# Altium PCB 175-00024_rev3, Backplane, Instrument Crate.PcbDoc (part 3 of 4)
Units mil, origin at the board's own origin, x right, y up, seen from the top; angles counter-clockwise.
Board outline 8400 x 10183.07 mil, 8 copper layers (Top Layer (*.GTL), Mid-Layer 1 (*.G1), +3.3V (*.GP1), +24V (*.GP2), RTN (*.GP3), +12V (*.GP4), Signal GND (*.GP5), Bottom Layer (*.GBL)); 240 components, 169 nets, 1580 pads, 490 vias.
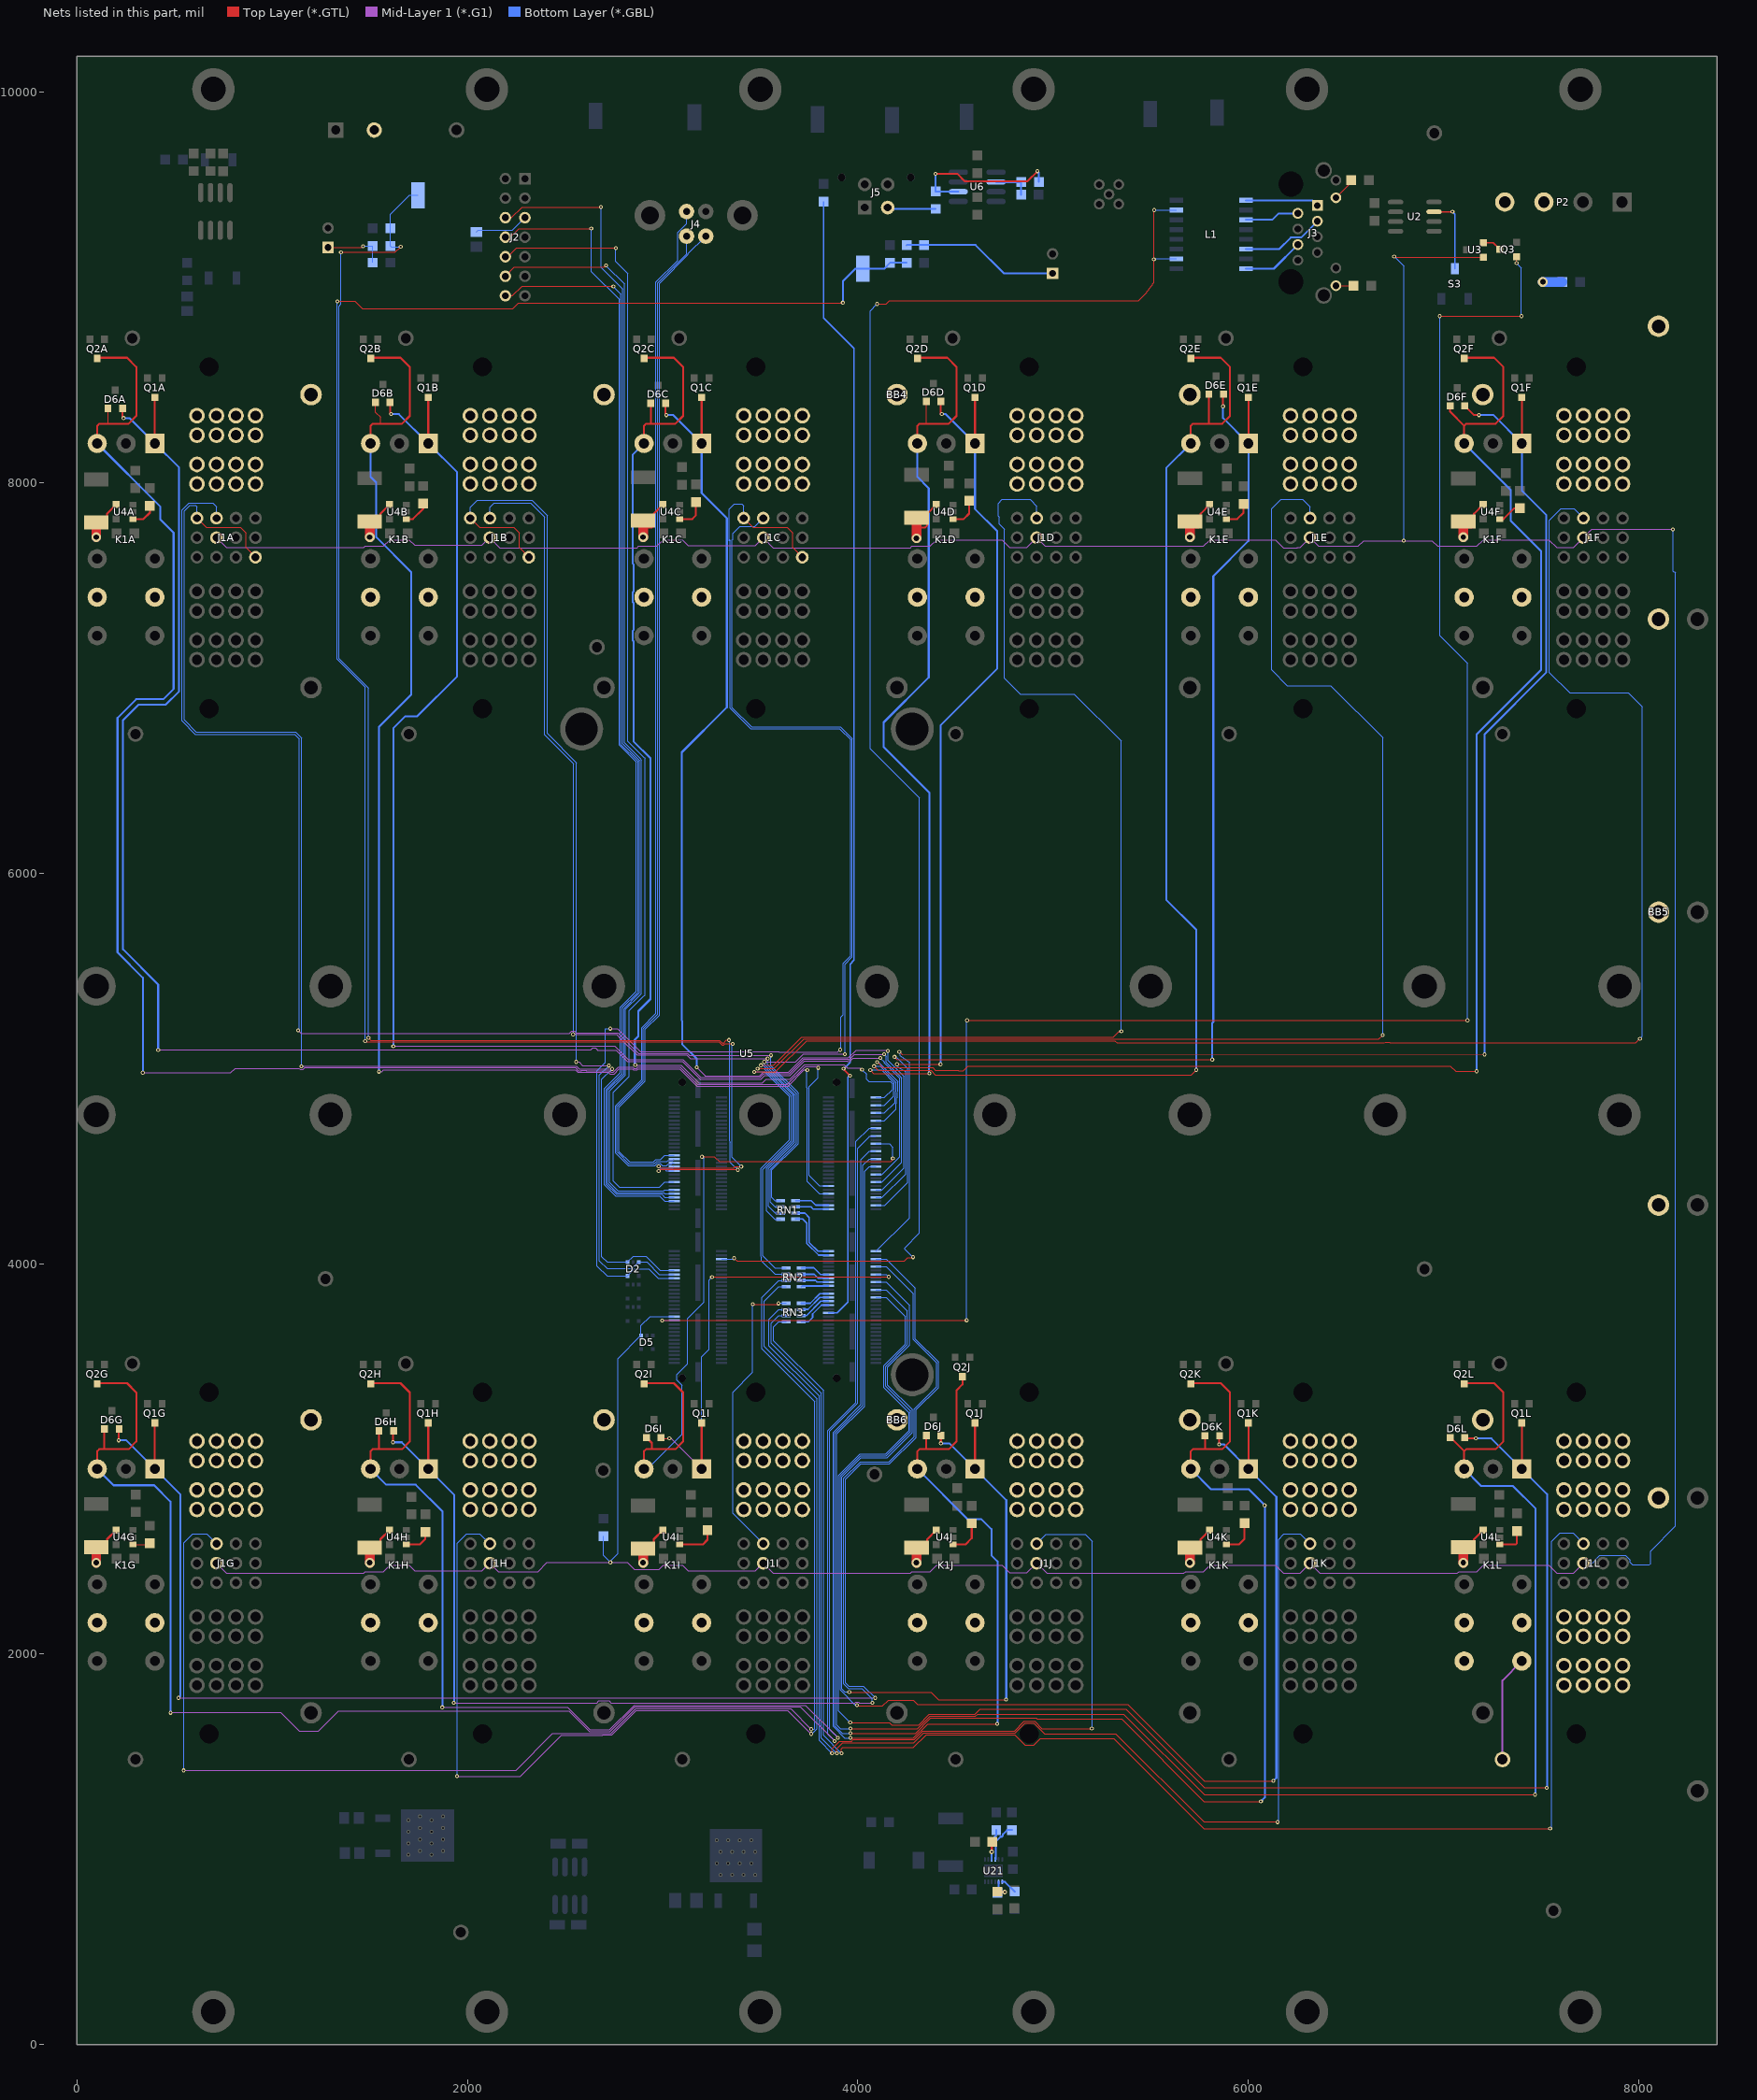
[diagram p9: the nets of this part, all layers, seen from the top]

## Via types
v1: diameter 20, hole 10, Top Layer (*.GTL) to Bottom Layer (*.GBL), 422 vias
v2: diameter 24, hole 10, Top Layer (*.GTL) to Bottom Layer (*.GBL), 28 vias
v3: diameter 50, hole 28, Top Layer (*.GTL) to Bottom Layer (*.GBL), 26 vias
v4: diameter 32, hole 20, Top Layer (*.GTL) to Bottom Layer (*.GBL), 10 vias
v5: diameter 25.98, hole 12.99, Top Layer (*.GTL) to Bottom Layer (*.GBL), tented top, 2 vias
v6: diameter 50, hole 25, Top Layer (*.GTL) to Bottom Layer (*.GBL), 2 vias

## Nets (pads, with @x,y where several pads share a name; then routed paths per layer and width w, separated by ;. In a path a pad name is that pad's centre, name@x,y a point inside that pad or via, vN(x,y) a via of type N, cw(c..) or ccw(c..) an arc to the next point about the centre after c; other vN are vias at no path point) (continued)
NetJ1L_13: J1L.13 J1L.14 K1L.14 TP10L.1 | length 544.8
  Mid-Layer 1 (*.G1) w10: TP10L.1@7300.99,1460.82 7300.99,1865.57 K1L.14@7399.99,1964.57
NetJ2_5: J2.5 R5.1 | length 279.5
  Bottom Layer (*.GBL) w5: R5.1@2046,9282.48 2055.63,9292.11 2231.03,9292.11 J2.5@2295,9356.08
NetJ3_1: J3.1 L1.1 | length 377.2
  Bottom Layer (*.GBL) w10: L1.1@5987,9445.08 6326,9445.08 J3.1@6353,9418.08
NetJ3_2: J3.2 L1.3 | length 279.7
  Bottom Layer (*.GBL) w10: L1.3@5987,9345.08 6122,9345.08 6155,9378.08 J3.2@6253,9378.08
NetJ3_3: J3.3 L1.6 | length 425.2
  Bottom Layer (*.GBL) w10: L1.6@5987,9195.08 6157,9195.08 6216.5,9254.58 6269.5,9254.58 J3.3@6353,9338.08
NetJ3_6: J3.6 L1.8 | length 316.9
  Bottom Layer (*.GBL) w10: L1.8@5987,9095.08 6130,9095.08 J3.6@6253,9218.08
NetJ3_10: J3.10 R6.2 | length 122.3
  Top Layer (*.GTL) w5: J3.10@6448,9458.08 6526,9536.08 R6.2@6526,9548.08
NetJ3_12: J3.12 R7.2 | length 91
  Top Layer (*.GTL) w5: J3.12@6448,9008.08 R7.2@6539,9008.08
NetJ5_2: J5.2 R16.1 | length 247.9
  Bottom Layer (*.GBL) w10: J5.2@4153,9408 4160,9401 R16.1@4398,9401
NetK1A_11: K1A.11 R4A.2 U4A.4 | length 261.4
  Top Layer (*.GTL) w10: R4A.2@100,7770 145,7770 155,7780 155,7840 U4A.4@202,7887
  Top Layer (*.GTL) w50: v3(100,7720) 100,7770 R4A.2@100,7795.76
NetK1B_11: K1B.11 R4B.2 U4B.4 | length 265.6
  Top Layer (*.GTL) w10: R4B.2@1500,7770 1545,7770 1555,7780 1555,7840 U4B.4@1602,7887
  Top Layer (*.GTL) w50: v3(1500,7720) 1500,7770 R4B.2@1500,7800
NetK1C_11: K1C.11 R4C.2 U4C.4 | length 265.6
  Top Layer (*.GTL) w10: 2900,7770 2945,7770 2955,7780 2955,7840 U4C.4@3002,7887
  Top Layer (*.GTL) w50: v3(2900,7720) 2900,7770 R4C.2@2900,7800
NetK1D_11: K1D.11 R4D.2 U4D.4 | length 271.6
  Top Layer (*.GTL) w10: 4300,7770 4345,7770 4355,7780 4355,7840 U4D.4@4402,7887
  Top Layer (*.GTL) w50: v3(4300,7714) 4300,7770 R4D.2@4300,7800
NetK1E_11: K1E.11 R4E.2 U4E.4 | length 265.6
  Top Layer (*.GTL) w10: R4E.2@5700,7770 5745,7770 5755,7780 5755,7840 U4E.4@5802,7887
  Top Layer (*.GTL) w50: v3(5700,7720) 5700,7770 R4E.2@5700,7800
NetK1F_11: K1F.11 R4F.2 U4F.4 | length 265.6
  Top Layer (*.GTL) w10: R4F.2@7100,7770 7145,7770 7155,7780 7155,7840 U4F.4@7202,7887
  Top Layer (*.GTL) w50: v3(7100,7720) 7100,7770 R4F.2@7100,7800
NetK1G_11: K1G.11 R4G.2 U4G.4 | length 265.6
  Top Layer (*.GTL) w10: R4G.2@99.99,2518.82 144.99,2518.82 154.99,2528.82 154.99,2588.82 U4G.4@201.99,2635.82
  Top Layer (*.GTL) w50: v3(99.99,2468.82) 99.99,2518.82 R4G.2@99.99,2548.82
NetK1H_11: K1H.11 R4H.2 U4H.4 | length 265.6
  Top Layer (*.GTL) w10: R4H.2@1499.99,2518.82 1544.99,2518.82 1554.99,2528.82 1554.99,2588.82 U4H.4@1601.99,2635.82
  Top Layer (*.GTL) w50: v3(1499.99,2468.82) 1499.99,2518.82 R4H.2@1499.99,2548.82
NetK1I_11: K1I.11 R4I.2 U4I.4 | length 235.6
  Top Layer (*.GTL) w10: R4I.2@2899.99,2518.82 2944.99,2518.82 2954.99,2528.82 2954.99,2588.82 U4I.4@3001.99,2635.82
  Top Layer (*.GTL) w50: v3(2899.99,2468.82) R4I.2@2899.99,2518.82
NetK1J_11: K1J.11 R4J.2 U4J.4 | length 265.6
  Top Layer (*.GTL) w10: R4J.2@4299.99,2518.82 4344.99,2518.82 4354.99,2528.82 4354.99,2588.82 U4J.4@4401.99,2635.82
  Top Layer (*.GTL) w50: v3(4299.99,2468.82) 4299.99,2518.82 R4J.2@4299.99,2548.82
NetK1K_11: K1K.11 R4K.2 U4K.4 | length 265.6
  Top Layer (*.GTL) w10: R4K.2@5699.99,2518.82 5744.99,2518.82 5754.99,2528.82 5754.99,2588.82 U4K.4@5801.99,2635.82
  Top Layer (*.GTL) w50: v3(5699.99,2468.82) 5699.99,2518.82 R4K.2@5699.99,2548.82
NetK1L_11: K1L.11 R4L.2 U4L.4 | length 265.6
  Top Layer (*.GTL) w10: R4L.2@7099.99,2518.82 7144.99,2518.82 7154.99,2528.82 7154.99,2588.82 U4L.4@7201.99,2635.82
  Top Layer (*.GTL) w50: v3(7099.99,2468.82) 7099.99,2518.82 R4L.2@7099.99,2548.82
NetP1_1: P1.1 R8.1 R9.2 | length 807.5
  Bottom Layer (*.GBL) w10: R9.2@4250,9215.08 4251,9216.08 4603.08,9216.08 4748.16,9071 P1.1@4997,9071
NetP4_1: P4.1 R10.1 R11.2 | length 317.3
  Top Layer (*.GTL) w5: P4.1@1287,9203 1460,9203 v1(1467,9210)
  Bottom Layer (*.GBL) w5: v1(1467,9210) 1468,9211 R11.2@1516,9211 R10.1@1516,9126
NetQ3_3: Q3.3 U3.2 | length 98.5
  Top Layer (*.GTL) w8: U3.2@7204,9228 7253,9228 Q3.3@7288,9193
NetR14_1: R14.1 R15.2 U6.2 | length 193
  Bottom Layer (*.GBL) w10: U6.2@4707.46,9539 4708.46,9538 4836,9538 R15.2@4836,9474
NetR14_2: R14.2 R16.2 U6.6 | length 824.1
  Top Layer (*.GTL) w10: v1(4398,9581) 4508,9581 4546,9543 4869,9543 v1(4920,9594)
  Bottom Layer (*.GBL) w10: v1(4398,9581) R16.2@4398,9491 4400,9489 U6.6@4514.54,9489 ; v1(4920,9594) 4927,9587 R14.2@4927,9539
NetR17_1: R17.1 U5.B93 | length 5863.3
  Top Layer (*.GTL) w6: v1(3927,4998) 3927,4995 v1(3959,4963)
  Bottom Layer (*.GBL) w6: R17.1@3824,9439 3824,8843 3981,8686 3981,5554 3960,5533 3960,5031 v1(3927,4998) ; U5.B93@3849.28,3748.07 3894.07,3748.07 3949,3803 3949,4953 v1(3959,4963)
NetR18A_2: R18A.2 U4A.1 | length 135.7
  Top Layer (*.GTL) w10: U4A.1@288,7813 342,7813 375,7846 R18A.2@375,7881
NetR18B_2: R18B.2 U4B.1 | length 134.5
  Top Layer (*.GTL) w10: U4B.1@1688,7813 1722,7813 1774,7865 R18B.2@1774,7892
NetR18C_2: R18C.2 U4C.1 | length 158.9
  Top Layer (*.GTL) w10: U4C.1@3088,7813 3152,7813 3171,7832 R18C.2@3171,7900
NetR18D_2: R18D.2 U4D.1 | length 158.6
  Top Layer (*.GTL) w10: U4D.1@4488,7813 4542,7813 4570,7841 R18D.2@4570,7906
NetR18E_2: R18E.2 U4E.1 | length 145.7
  Top Layer (*.GTL) w10: U4E.1@5888,7813 5942,7813 5975,7846 R18E.2@5975,7891
NetR18F_2: R18F.2 U4F.1 | length 124.8
  Top Layer (*.GTL) w10: U4F.1@7288,7813 7307,7813 7362,7868 R18F.2@7390,7868
NetR18G_2: R18G.2 U4G.1 | length 89.6
  Top Layer (*.GTL) w5: U4G.1@287.99,2561.82 368.82,2561.82 R18G.2@375,2568
NetR18H_2: R18H.2 U4H.1 | length 144.1
  Top Layer (*.GTL) w10: U4H.1@1687.99,2561.82 1755.82,2561.82 1785,2591 R18H.2@1785,2626
NetR18I_2: R18I.2 U4I.1 | length 202
  Top Layer (*.GTL) w10: U4I.1@3087.99,2561.82 3205.82,2561.82 3230,2586 R18I.2@3230,2636
NetR18J_2: R18J.2 U4J.1 | length 184.3
  Top Layer (*.GTL) w10: U4J.1@4487.99,2561.82 4550.82,2561.82 4583,2594 R18J.2@4583,2670
NetR18K_2: R18K.2 U4K.1 | length 184.1
  Top Layer (*.GTL) w10: U4K.1@5887.99,2561.82 5950.82,2561.82 5980,2591 R18K.2@5980,2671
NetR18L_2: R18L.2 U4L.1 | length 152.8
  Top Layer (*.GTL) w10: U4L.1@7287.99,2561.82 7369.18,2561.82 7375,2567.64 R18L.2@7375,2631
NetR29_2: R29.2 R30.2 U21.9 | length 212.9
  Top Layer (*.GTL) w10: v2(4685.8,988.34) 4685.8,1036.34 R29.2@4688.8,1039.34
  Bottom Layer (*.GBL) w10: U21.9@4685.65,948.52 v2@4685.65,988.19 ; v2(4685.8,988.34) v2@4685.65,988.19 ; R30.2@4708.8,1099.34 4708.8,1072.34 4685.65,1049.19 v2@4685.65,988.19
NetR31_2: R31.2 U21.10 | length 204.2
  Bottom Layer (*.GBL) w10: U21.10@4703.37,948.52 4706.8,951.95 4706.8,1041.34 4730.8,1065.34 4737.53,1065.34 4742.8,1070.62 4742.8,1077.34 4764.8,1099.34 R31.2@4788.8,1099.34
NetR32_1: R32.1 R34.2 U21.2 | length 129.6
  Top Layer (*.GTL) w10: R34.2@4713.8,784.34 4715.8,782.34 v2(4752.8,782.34)
  Bottom Layer (*.GBL) w10: U21.2@4721.08,834.34 4721.08,786.63 4716.8,782.34 v2(4752.8,782.34)
NetR33_2: R33.2 U21.1 | length 85.7
  Bottom Layer (*.GBL) w10: U21.1@4738.8,834.34 4753.8,834.34 R33.2@4803.8,784.34
NetRN1_2: RN1.2 U5.B63 | length 306.1
  Bottom Layer (*.GBL) w8: RN1.2@3680.71,4227.6 3681.71,4228.6 3717,4228.6 3739,4206.6 3739,4103.49 3799.15,4043.35 U5.B63@3849.28,4043.35
NetRN1_4: RN1.4 U5.B61 | length 324.8
  Bottom Layer (*.GBL) w8: RN1.4@3680.71,4259.09 3728.5,4259.09 3751,4236.6 3751,4108.46 3796.43,4063.03 U5.B61@3849.28,4063.03
NetRN1_6: RN1.6 U5.B59 | length 173.1
  Bottom Layer (*.GBL) w8: RN1.6@3680.71,4290.59 3760.01,4290.59 3771.03,4279.57 U5.B59@3849.28,4279.57
NetRN1_8: RN1.8 U5.B57 | length 178
  Bottom Layer (*.GBL) w8: RN1.8@3680.71,4322.09 3761.51,4322.09 3784.35,4299.25 U5.B57@3849.28,4299.25
NetRN2_2: RN2.2 U5.B79 | length 139.9
  Bottom Layer (*.GBL) w8: RN2.2@3710.71,3882.6 3713.98,3885.87 U5.B79@3849.28,3885.87
NetRN2_4: RN2.4 U5.B77 | length 142.1
  Bottom Layer (*.GBL) w8: RN2.4@3710.71,3914.09 3782.5,3914.09 3791.05,3905.55 U5.B77@3849.28,3905.55
NetRN2_6: RN2.6 U5.B75 | length 147
  Bottom Layer (*.GBL) w8: RN2.6@3710.71,3945.59 3777.01,3945.59 3797.36,3925.24 U5.B75@3849.28,3925.24
NetRN2_8: RN2.8 U5.B73 | length 153.1
  Bottom Layer (*.GBL) w8: RN2.8@3710.71,3977.09 3712.22,3978.6 3775,3978.6 3808.68,3944.92 U5.B73@3849.28,3944.92
NetRN3_2: RN3.2 U5.B89 | length 184.3
  Bottom Layer (*.GBL) w8: RN3.2@3710.71,3702.6 3747,3702.6 3768,3723.6 3768,3741.6 3813.84,3787.44 U5.B89@3849.28,3787.44
NetRN3_4: RN3.4 U5.B87 | length 168.8
  Bottom Layer (*.GBL) w8: RN3.4@3710.71,3734.09 3737.5,3734.09 3810.53,3807.13 U5.B87@3849.28,3807.13
NetRN3_6: RN3.6 U5.B85 | length 163.9
  Bottom Layer (*.GBL) w8: RN3.6@3710.71,3765.59 3743.99,3765.59 3805.21,3826.81 U5.B85@3849.28,3826.81
NetRN3_8: RN3.8 U5.B83 | length 159
  Bottom Layer (*.GBL) w8: RN3.8@3710.71,3797.09 3756.69,3797.09 3806.1,3846.5 U5.B83@3849.28,3846.5
NetS3_2: S3.2 U2.7 | length 390.8
  Top Layer (*.GTL) w8: U2.7@6950.43,9386 v1(7045,9386)
  Bottom Layer (*.GBL) w8: v1(7045,9386) 7057,9374 S3.2@7057,9094.77
PWR_OFF1: D6A.2 K1A.1 Q1A.3 U5.B42 | length 8486.1
  Top Layer (*.GTL) w5: K1A.1@400,8200 K1A.1@417.92,8182.08
  Top Layer (*.GTL) w10: D6A.2@234.8,8380 234.8,8335.2 v1(240,8330) ; K1A.1@400,8200 Q1A.3@400,8438.74
  Mid-Layer 1 (*.G1) w5: v1@417,5095.91 2633.5,5095.91 2643.17,5105.58 2656.83,5105.58 2666.5,5095.91 2666.5,5093.08 2762.46,5093.08 2820.46,5035.08 3101.46,5035.08 3192.46,4944.08 3503.54,4944.08 3522.54,4963.08 3653.21,4963.08 3727.21,5037.08 3944.54,5037.08 3946.08,5035.54 3958.92,5035.54 3976.46,5053.08 v1(4115,5053.08)
  Bottom Layer (*.GBL) w5: U5.B42@4092.59,4456.73 4124,4456.73 4215,4547.73 4215,4948.35 4136,5027.35 4136,5032.08 v1(4115,5053.08)
  Bottom Layer (*.GBL) w10: v1(240,8330) 270,8330 K1A.1@400,8200 524,8076 524,6931.08 455,6862.08 316,6862.08 237,6783.08 237,5609.08 417,5429.08 v1(417,5094.08)
PWR_OFF2: D6B.2 K1B.1 Q1B.3 U5.B46 | length 7269.3
  Top Layer (*.GTL) w10: D6B.2@1604.8,8410 1604.8,8355.2 v1(1610,8350) ; K1B.1@1800,8200 Q1B.3@1800,8438.74
  Mid-Layer 1 (*.G1) w5: v1@1621,5114.08 2638.94,5114.08 2639.44,5114.58 2660.56,5114.58 2661.06,5114.08 2754.18,5114.08 2824.18,5044.08 3105.18,5044.08 3196.18,4953.08 3499.82,4953.08 3518.82,4972.08 3649.48,4972.08 3723.48,5046.08 3948.27,5046.08 3949.81,5044.54 3955.19,5044.54 3982.73,5072.08 v1(4135,5072.08)
  Bottom Layer (*.GBL) w5: U5.B46@4092.59,4417.36 4124,4417.36 4225,4518.36 4225,4951.08 4151.58,5024.49 4145,5031.08 4145,5062.08 v1(4135,5072.08)
  Bottom Layer (*.GBL) w10: v1(1610,8350) 1650,8350 K1B.1@1800,8200 1948,8052 1948,7007.08 1744,6803.08 1683,6803.08 1621,6741.08 v1(1621,5113.08)
PWR_OFF3: D6C.2 K1C.1 Q1C.3 U5.B50 | length 5793.6
  Top Layer (*.GTL) w10: D6C.2@3014.8,8405 3014.8,8350.2 v1(3020,8345) ; K1C.1@3200,8200 Q1C.3@3200,8438.74
  Mid-Layer 1 (*.G1) w5: v1(3175,5005.08) 3217,4963.08 ; 3217,4962.08 3496.09,4962.08 3515.09,4981.08 3645.75,4981.08 3719.75,5055.08 3952,5055.08 3952.5,5054.58 3991,5093.08 4150,5093.08 v1(4154,5089.08)
  Mid-Layer 1 (*.G1) w10: v1@3175,5003.17 v1(3175,5005.08)
  Bottom Layer (*.GBL) w5: U5.B50@4092.59,4377.99 4124,4377.99 4235,4488.99 4235,4957.99 4154,5038.99 v1(4154,5089.08)
  Bottom Layer (*.GBL) w10: v1(3020,8345) 3055,8345 K1C.1@3200,8200 3200,7946.08 3329,7817.08 3329,6849.08 3098,6618.08 3098,5245.08 3100,5243.08 3100,5124.08 3175,5049.08 v1(3175,5005.08)
PWR_OFF4: D6D.2 K1D.1 Q1D.3 U5.B54 | length 4895.8
  Top Layer (*.GTL) w5: v1@4200,5021.76 v1@4423,5021.76
  Top Layer (*.GTL) w10: D6D.2@4424.8,8415 4424.8,8355.2 v1(4430,8350) ; K1D.1@4600,8200 Q1D.3@4600,8438.74
  Bottom Layer (*.GBL) w5: U5.B54@4092.59,4338.62 4124,4338.62 4245,4459.62 4245,4981.93 4204.14,5005.58 v1(4200,5021.08)
  Bottom Layer (*.GBL) w10: v1(4423,5021.08) 4423,6756.08 4714,7047.08 4714,7750.08 4600,7864.08 K1D.1@4600,8200 4450,8350 v1(4430,8350)
PWR_OFF5: D6E.2 K1E.1 Q1E.3 U5.B58 | length 6296.9
  Top Layer (*.GTL) w5: v1(4188,5059) 4201.27,5045.73 v1@5815,5045.73
  Top Layer (*.GTL) w10: v1(5870,8390) 5870,8450.08 D6E.2@5872.4,8452.48 ; K1E.1@6000,8200 Q1E.3@6000,8438.74
  Bottom Layer (*.GBL) w5: U5.B58@4092.59,4299.25 4139.17,4299.25 4255,4415.08 4255,5000 4201.21,5053.79 4193.21,5053.79 v1(4188,5059)
  Bottom Layer (*.GBL) w10: v1(5815,5045.08) 5815,5231.95 5820,5236.95 5820,7520.08 6000,7700.08 K1E.1@6000,8200 5870,8330 v1(5870,8390)
PWR_OFF6: D6F.2 K1F.1 Q1F.3 U5.B62 | length 8045.1
  Top Layer (*.GTL) w5: v1(4212,5085) 4227,5070 4228,5070 v1@7209,5069.7
  Top Layer (*.GTL) w10: D6F.2@7107.4,8392.48 7154.88,8345 v1(7180,8345) ; K1F.1@7400,8200 Q1F.3@7400,8438.74
  Bottom Layer (*.GBL) w5: U5.B62@4092.59,4063.03 4264,4234.44 4264,5030.81 4215.37,5065.27 v1(4212,5085)
  Bottom Layer (*.GBL) w10: v1(7180,8345) 7255,8345 K1F.1@7400,8200 7400,7959.08 7526,7833.08 7526,7028.08 7209,6711.08 v1(7209,5071.08)
PWR_OFF7: D6G.2 K1G.1 Q1G.3 U5.B66 | length 8139.1
  Top Layer (*.GTL) w10: v1(215,3095) D6G.2@215,3151.34 ; K1G.1@399.99,2948.82 Q1G.3@399.99,3187.56
  Mid-Layer 1 (*.G1) w5: v1(521,1776.08) v1(4089,1776.08)
  Bottom Layer (*.GBL) w5: v1(4089,1776.08) 4029,1836.08 3954,1836.08 3937,1853.08 3937,2896.08 4016,2975.08 4162.71,2975.08 4297.5,3109.87 4297.5,3251.77 4412,3366.27 4412,3495.73 4294,3613.73 4294,3874.66 4145,4023.66 U5.B66@4092.59,4023.66
  Bottom Layer (*.GBL) w10: v1(215,3095) 253.81,3095 K1G.1@399.99,2948.82 530,2818.81 530,1785.08 v1(521,1776.08)
PWR_OFF8: D6H.2 K1H.1 Q1H.3 U5.B70 | length 6717.7
  Top Layer (*.GTL) w10: v1(1620,3085) 1620,3141.34 D6H.2@1622.4,3143.74 ; K1H.1@1799.99,2948.82 Q1H.3@1799.99,3187.56
  Mid-Layer 1 (*.G1) w5: v1(1931,1751.08) 2664.1,1751.08 2674.53,1761.5 2725.47,1761.5 2735.9,1751.08 3984.67,1751.08 3989.17,1755.58 4002.83,1755.58 4007.33,1751.08 v1(4074,1751.08)
  Bottom Layer (*.GBL) w5: v1(4074,1751.08) 4074,1766.24 4072.5,1767.74 4072.5,1770.58 4020,1823.08 3952,1823.08 3928,1847.08 3928,2899.81 4013.27,2985.08 4158.57,2985.08 4288.5,3115.01 4288.5,3255.5 4403,3370 4403,3492 4284,3611 4284,3845.29 4145,3984.29 U5.B70@4092.59,3984.29
  Bottom Layer (*.GBL) w10: v1(1620,3085) 1663.81,3085 K1H.1@1799.99,2948.82 1932,2816.81 1932,1752.08 v1(1931,1751.08)
PWR_OFF9: D6I.2 K1I.1 Q1I.3 U5.B74 | length 2492.8
  Top Layer (*.GTL) w5: D6I.2@2992.4,3108.74 2996.14,3105 v1(3035,3105) ; v1(3253,3931.08) 4157,3931.08 v1(4158,3932.08)
  Top Layer (*.GTL) w10: K1I.1@3199.99,2948.82 Q1I.3@3199.99,3187.56
  Mid-Layer 1 (*.G1) w5: v1(3035,3105) 3043.81,3105 K1I.1@3199.99,2948.82
  Bottom Layer (*.GBL) w5: K1I.1@3199.99,2948.82 3199.99,3523.39 3237.5,3560.91 3237.5,3915.58 v1(3253,3931.08) ; U5.B74@4092.59,3944.92 4145,3944.92 ; 4145.16,3944.92 v1(4158,3932.08)
PWR_OFF10: D6J.2 K1J.1 Q1J.3 U5.B78 | length 5130.1
  Top Layer (*.GTL) w5: v1(3956,1806.08) 4374.09,1806.08 4412.36,1767.81 v1@4759,1767.81
  Top Layer (*.GTL) w10: v1(4425,3080) D6J.2@4425,3120 ; K1J.1@4599.99,2948.82 Q1J.3@4599.99,3187.56
  Bottom Layer (*.GBL) w5: v1(3956,1806.08) 3954,1808.08 3932,1808.08 3919,1821.08 3919,2908.08 4016,3005.08 4150.28,3005.08 4279.5,3134.29 4279.5,3251.5 4153,3378 4153,3470.82 4264,3581.82 4264,3786.55 4145,3905.55 U5.B78@4092.59,3905.55
  Bottom Layer (*.GBL) w10: v1(4425,3080) 4468.81,3080 K1J.1@4599.99,2948.82 4760,2788.81 4760,1769.08 v1(4759,1768.08)
PWR_OFF11: D6K.2 K1K.1 Q1K.3 U5.B82 | length 7055.8
  Top Layer (*.GTL) w5: v1(3996,1739.08) 4000.5,1734.58 4126.5,1734.58 4156,1764.08 4285,1764.08 4306.27,1742.81 5382.54,1742.81 5774.26,1351.08 v1@6128,1351.08
  Top Layer (*.GTL) w10: v1(5850,3075) 5850,3116.34 D6K.2@5852.4,3118.74 ; K1K.1@5999.99,2948.82 Q1K.3@5999.99,3187.56
  Bottom Layer (*.GBL) w5: v1(3996,1739.08) 3988.27,1739.08 3910,1817.35 3910,2911.81 4013.27,3015.08 4146.14,3015.08 4270.5,3139.44 4270.5,3245.5 4143,3373 4143,3473.55 4254,3584.55 4254,3757.18 4145,3866.18 U5.B82@4092.59,3866.18
  Bottom Layer (*.GBL) w10: v1(5850,3075) 5873.81,3075 K1K.1@5999.99,2948.82 6143,2805.81 6143,1367.08 v1(6128,1352.08)
PWR_OFF12: D6L.2 K1L.1 Q1L.3 U5.B86 | length 8675.9
  Top Layer (*.GTL) w5: v1(3961,1650.08) 4162.95,1650.08 4174.53,1638.5 4312.78,1638.5 4365.92,1691.64 4599.38,1691.64 4625.54,1717.81 5372.18,1717.81 5773.91,1316.08 v1@7529,1316.08
  Top Layer (*.GTL) w10: D6L.2@7107.4,3108.74 7111.14,3105 v1(7165,3105) ; K1L.1@7399.99,2948.82 Q1L.3@7399.99,3187.56
  Bottom Layer (*.GBL) w5: v1(3961,1650.08) 3901,1710.08 3901,2915.53 4010.54,3025.08 4142,3025.08 4261.5,3144.58 4261.5,3236.5 4134,3364 4134,3477.27 4244,3587.27 4244,3727.81 4145,3826.81 U5.B86@4092.59,3826.81
  Bottom Layer (*.GBL) w10: v1(7165,3105) 7243.81,3105 K1L.1@7399.99,2948.82 7529,2819.81 7529,1317.08 v1(7528,1316.08)
PWR_ON1: D6A.1 K1A.2 Q2A.3 U5.B47 | length 8769.4
  Top Layer (*.GTL) w5: 160,8301.14 D6A.1@160,8380
  Top Layer (*.GTL) w10: K1A.2@104.72,8200 104.72,8290.37 115.5,8301.14 160,8301.14 265.5,8301.14 305.5,8341.14 305.5,8591.14 257.9,8638.74 Q2A.3@105,8638.74
  Mid-Layer 1 (*.G1) w5: v1@338,4977.6 788.29,4977.6 810.77,5000.08 1137.67,5000.08 1144.17,4993.58 1157.83,4993.58 1167.33,5003.08 2554.39,5003.08 2569.39,4988.08 2584.4,4988.08 2585.4,4989.08 2608.6,4989.08 2609.6,4988.08 2727.67,4988.08 2735.17,4980.58 2748.83,4980.58 2774.33,5006.08 2847.67,5006.08 2853.17,5000.58 2866.83,5000.58 2872.33,5006.08 3089.73,5006.08 3178.73,4917.08 3638,4917.08 3731,5010.08 3789,5010.08 v1(3797,5002.08)
  Bottom Layer (*.GBL) w5: v1(3797,5002.08) 3797,4951.08 3751,4905.08 3751,4450.68 3804,4397.68 U5.B47@3849.28,4397.68
  Bottom Layer (*.GBL) w10: K1A.2@104.72,8200 427,7877.72 427,7812.08 496,7743.08 496,6942.68 443.4,6890.08 304.4,6890.08 209,6794.68 209,5594.08 339,5464.08 339,4979.08 v1(338,4978.08)
PWR_ON2: D6B.1 K1B.2 Q2B.3 U5.B51 | length 7268.9
  Top Layer (*.GTL) w5: D6B.1@1530,8410 1530,8360 1555,8335 1555,8301.14
  Top Layer (*.GTL) w10: K1B.2@1504.72,8200 1504.72,8290.37 1515.5,8301.14 1555,8301.14 1665.5,8301.14 1705.5,8341.14 1705.5,8591.14 1657.9,8638.74 Q2B.3@1505,8638.74
  Mid-Layer 1 (*.G1) w5: v1(1548,4983.08) 1562.48,4983.08 1570.48,4991.08 2553.66,4991.08 2565.66,4979.08 2588.13,4979.08 2589.13,4980.08 2604.87,4980.08 2605.87,4979.08 2723.94,4979.08 2731.44,4971.58 2752.56,4971.58 2777.06,4996.08 2844.94,4996.08 2849.44,4991.58 2870.56,4991.58 2875.06,4996.08 3087,4996.08 3175,4908.08 3641.73,4908.08 3724.73,4991.08 v1(3741,4991.08)
  Bottom Layer (*.GBL) w5: v1(3741,4991.08) 3739,4989.08 3739,4902.08 3741,4900.08 3741,4421.31 3804,4358.31 U5.B51@3849.28,4358.31
  Bottom Layer (*.GBL) w10: K1B.2@1504.72,8200 1504.72,8028.36 1534,7999.08 1534,7720.08 1713,7541.08 1713,6913.08 1548,6748.08 v1(1548,4983.08)
PWR_ON3: D6C.1 K1C.2 Q2C.3 U5.B2 | length 5752.5
  Top Layer (*.GTL) w10: K1C.2@2904.72,8200 2904.72,8290.37 2915.5,8301.14 2940,8301.14 ; Q2C.3@2905,8638.74 3057.9,8638.74 3105.5,8591.14 3105.5,8341.14 3065.5,8301.14 2940,8301.14 ; D6C.1@2940,8405 2940,8301.14
  Mid-Layer 1 (*.G1) w5: v1(2860,5017.08) 3094,5017.08 3185,4926.08 3511,4926.08 3530,4945.08 3653.27,4945.08 3727.27,5019.08 3929.73,5019.08 3946.85,5001.96 4012.12,5001.96 v1(4021,4993.08)
  Bottom Layer (*.GBL) w5: v1(4021,4993.08) 4044,4970.08 4044,4945.34 4056.38,4932.96 4166.12,4932.96 4178,4921.08 4178,4892.43 4136,4850.43 U5.B2@4092.59,4850.43
  Bottom Layer (*.GBL) w10: v1@2858,5017.08 2858,5146.55 2876,5164.55 2876,5292.53 2938,5354.53 2938,6588.25 2851,6675.25 2851,7187.15 2846.51,7191.64 2846.51,7239.86 2851,7244.35 2851,7384 2846.51,7388.49 2846.51,7436.71 2851,7441.2 2851,7580.85 2846.51,7585.34 2846.51,8141.79 K1C.2@2904.72,8200
PWR_ON4: D6D.1 K1D.2 Q2D.3 U5.B6 | length 4976.1
  Top Layer (*.GTL) w5: v1(4064,4991.08) 4081,4974.08 v1(4367,4974.08) ; 4350,8301.14 D6D.1@4350,8415
  Top Layer (*.GTL) w10: K1D.2@4304.72,8200 4304.72,8290.37 4315.5,8301.14 4350,8301.14 4465.5,8301.14 4505.5,8341.14 4505.5,8591.14 4457.9,8638.74 Q2D.3@4305,8638.74
  Bottom Layer (*.GBL) w5: v1(4064,4991.08) 4120.73,4991.08 4187,4924.81 4187,4888.71 4184,4885.71 4184,4859.06 4136,4811.06 U5.B6@4092.59,4811.06
  Bottom Layer (*.GBL) w10: K1D.2@4304.72,8200 4304.72,8028.36 4362.94,7970.15 4362.94,7002.02 4132,6771.08 4132,6646.17 4366,6412.17 4366,5011.08 4365,5010.08 v1@4365,4976.08
PWR_ON5: D6E.1 K1E.2 Q2E.3 U5.B10 | length 6309.5
  Top Layer (*.GTL) w5: v1(4083,5011.08) 4104,4990.08 4359.67,4990.08 4360.17,4990.58 4373.83,4990.58 4397.51,4966.9 5707.82,4966.9 v1(5733,4992.08)
  Top Layer (*.GTL) w10: K1E.2@5704.72,8200 5704.72,8290.37 5715.5,8301.14 5800,8301.14 ; Q2E.3@5705,8638.74 5857.9,8638.74 5905.5,8591.14 5905.5,8341.14 5865.5,8301.14 5800,8301.14 ; D6E.1@5797.6,8452.48 5797.6,8303.54 5800,8301.14
  Bottom Layer (*.GBL) w5: v1(4083,5011.08) 4113.46,5011.08 4196,4928.53 4196,4884.98 4193,4881.98 4193,4855.33 4190,4852.33 4190,4825.69 4136,4771.69 U5.B10@4092.59,4771.69
  Bottom Layer (*.GBL) w10: K1E.2@5704.72,8200 5579,8074.28 5579,5864.08 5732,5711.08 v1@5732,4992.08
PWR_ON6: D6F.1 K1F.2 Q2F.3 U5.B14 | length 7957
  Top Layer (*.GTL) w5: v1(4099,5032.08) 4126,5005.08 4192.67,5005.08 4193.17,5004.58 4383.5,5004.58 4397.5,4990.58 4513.5,4990.58 4516.5,4987.58 4539.83,4987.58 4563.33,5011.08 7033.67,5011.08 7060.87,4983.87 v1@7168,4983.87
  Top Layer (*.GTL) w10: D6F.1@7032.6,8392.48 7032.6,8362.49 7104.72,8290.37 ; K1F.2@7104.72,8200 7104.72,8290.37 ; Q2F.3@7105,8638.74 7257.9,8638.74 7305.5,8591.14 7305.5,8341.14 7265.5,8301.14 7115.5,8301.14 7104.72,8290.37
  Bottom Layer (*.GBL) w5: U5.B14@4092.59,4732.32 4136,4732.32 4196,4792.32 4196,4818.96 4199,4821.96 4199,4848.61 4202,4851.61 4202,4878.25 4205,4881.25 4205,4932.26 4105.18,5032.08 v1(4099,5032.08)
  Bottom Layer (*.GBL) w10: K1F.2@7104.72,8200 7343,7961.72 7343,7804.08 7498.5,7648.58 7498.5,7039.84 7168,6709.34 v1(7168,4985.08)
PWR_ON7: D6G.1 K1G.2 Q2G.3 U5.B18 | length 9337.3
  Top Layer (*.GTL) w10: K1G.2@104.71,2948.82 104.71,3039.19 115.49,3049.96 140,3049.96 ; Q2G.3@104.99,3387.56 257.89,3387.56 305.49,3339.96 305.49,3089.96 265.49,3049.96 140,3049.96 ; D6G.1@142.6,3153.74 140,3151.14 140,3049.96
  Mid-Layer 1 (*.G1) w5: v1@481,1701.08 1044.27,1701.08 1139.27,1606.08 1238,1606.08 1340,1708.08 2521.27,1708.08 2625.27,1604.08 2732,1604.08 2858,1730.08 3706.06,1730.08 v1(3881.03,1555.11)
  Bottom Layer (*.GBL) w5: v1(3881.03,1555.11) 3847,1589.14 3847,3146.08 3990.03,3289.11 3990.03,4624.98 4058,4692.95 U5.B18@4092.59,4692.95
  Bottom Layer (*.GBL) w10: K1G.2@104.71,2948.82 188.45,2865.08 397,2865.08 480,2782.08 480,1701.08 v1(481,1700.08)
PWR_ON8: D6H.1 K1H.2 Q2H.3 U5.B22 | length 7747.6
  Top Layer (*.GTL) w10: K1H.2@1504.71,2948.82 1504.71,3039.19 1515.49,3049.96 1665.49,3049.96 1705.49,3089.96 1705.49,3339.96 1657.89,3387.56 Q2H.3@1504.99,3387.56 ; 1547.6,3052.56 D6H.1@1547.6,3143.74
  Mid-Layer 1 (*.G1) w5: v1(1872,1728.08) 2514,1728.08 2629,1613.08 2728.27,1613.08 2854.27,1739.08 3731,1739.08 v1(3898,1572.08)
  Bottom Layer (*.GBL) w5: v1(3898,1572.08) 3856,1614.08 3856,3142.35 3999.03,3285.38 3999.03,4591.06 4058,4650.03 4058,4653.58 U5.B22@4092.59,4653.58
  Bottom Layer (*.GBL) w10: K1H.2@1504.71,2948.82 1585.45,2868.08 1736,2868.08 1873,2731.08 1873,1729.08 v1(1872,1728.08)
PWR_ON9: D6I.1 K1I.2 Q2I.3 U5.B26 | length 3762.6
  Top Layer (*.GTL) w5: v1(3202,4547.08) 3265,4547.08 3290,4522.08 4169,4522.08 4179,4532.08 v1(4179,4539.08)
  Top Layer (*.GTL) w10: K1I.2@2904.71,2948.82 2904.71,3039.19 2915.49,3049.96 2945,3049.96 ; Q2I.3@2904.99,3387.56 3057.89,3387.56 3105.49,3339.96 3105.49,3089.96 3065.49,3049.96 2945,3049.96 ; D6I.1@2917.6,3108.74 2945,3081.34 2945,3049.96
  Bottom Layer (*.GBL) w5: K1I.2@2904.71,2948.82 2922.02,2948.82 3098.5,3125.3 3098.5,3378.19 3073.88,3402.81 3073.88,3432.64 3128.28,3487.04 3128.28,3718.22 3212.5,3802.44 3212.5,4536.58 v1(3202,4547.08) ; U5.B26@4092.59,4614.21 4160.87,4614.21 4179,4596.08 v1(4179,4539.08)
PWR_ON10: D6J.1 K1J.2 Q2J.3 U5.B30 | length 6198.3
  Top Layer (*.GTL) w5: v1(3962,1571.08) 4285,1571.08 4357,1643.08 v1(4714,1643.08) v1@4715,1644.08
  Top Layer (*.GTL) w10: K1J.2@4304.71,2948.82 4304.71,3039.19 4315.49,3049.96 4465.49,3049.96 4505.49,3089.96 4505.49,3351.13 4535.5,3381.14 Q2J.3@4535.5,3424.88 ; 4350.2,3050.16 D6J.1@4350.2,3120
  Bottom Layer (*.GBL) w5: v1(3962,1571.08) 3932.54,1571.08 3874,1629.62 3874,3134.9 4017.03,3277.93 4017.03,4533.87 4058,4574.84 U5.B30@4092.59,4574.84
  Bottom Layer (*.GBL) w10: K1J.2@4304.71,2948.82 4562.45,2691.08 4633,2691.08 4684,2640.08 4684,2506.08 4715,2475.08 4715,1644.08 v1(4714,1643.08)
PWR_ON11: D6K.1 K1K.2 Q2K.3 U5.B34 | length 8247.2
  Top Layer (*.GTL) w5: v1(3962,1595.08) 4294.82,1595.08 4373.38,1673.64 4912.67,1673.64 4918.51,1667.81 5351.47,1667.81 5773.2,1246.08 v1(6064,1246.08)
  Top Layer (*.GTL) w10: K1K.2@5704.71,2948.82 5704.71,3039.19 5715.49,3049.96 5865.49,3049.96 5905.49,3089.96 5905.49,3339.96 5857.89,3387.56 Q2K.3@5704.99,3387.56 ; 5777.6,3052.56 D6K.1@5777.6,3118.74
  Bottom Layer (*.GBL) w5: v1(3962,1595.08) 3921.27,1595.08 3883,1633.35 3883,3131.17 4026.03,3274.2 4026.03,4503.5 4058,4535.47 U5.B34@4092.59,4535.47
  Bottom Layer (*.GBL) w10: K1K.2@5704.71,2948.82 5809.45,2844.08 6003,2844.08 v1@6084,2763.08 ; v1(6064,1246.08) 6084,1266.08 v1@6084,2763.08 ; v1(6083,2762.08) v1@6084,2763.08
PWR_ON12: D6L.1 K1L.2 Q2L.3 U5.B38 | length 9549.6
  Top Layer (*.GTL) w5: v1(3962,1619.08) 4306.09,1619.08 4369.65,1682.64 4603.11,1682.64 4613.27,1692.81 5361.83,1692.81 5773.55,1281.08 v1@7471,1281.08
  Top Layer (*.GTL) w10: D6L.1@7032.6,3108.74 7035.16,3108.74 7104.71,3039.19 ; K1L.2@7104.71,2948.82 7104.71,3039.19 ; Q2L.3@7104.99,3387.56 7257.89,3387.56 7305.49,3339.96 7305.49,3089.96 7265.49,3049.96 7115.49,3049.96 7104.71,3039.19
  Bottom Layer (*.GBL) w5: v1(3962,1619.08) 3910,1619.08 3892,1637.08 3892,3127.44 4035.03,3270.47 4035.03,4473.13 4058,4496.1 U5.B38@4092.59,4496.1
  Bottom Layer (*.GBL) w10: K1L.2@7104.71,2948.82 7192.45,2861.08 7355,2861.08 7471,2745.08 7471,1285.08 v1(7467,1281.08)
RTN: BB4.1 BB5.1 BB6.1 C22.2 J1A.15 J1A.16 J1B.15 J1B.16 J1C.15 J1C.16 J1D.15 J1D.16 J1E.15 J1E.16 J1F.15 J1F.16 J1G.15 J1G.16 J1H.15 J1H.16 J1I.15 J1I.16 J1J.15 J1J.16 J1K.15 J1K.16 J1L.15 J1L.16 P2.3 P2.4 R1.1 | length 100
  Bottom Layer (*.GBL) w50: v3(7507.48,9027.08) R1.1@7607.48,9027.08
SILICON_SN: D5.1 J1A.6 J1B.6 J1C.6 J1D.6 J1E.6 J1F.6 J1G.6 J1H.6 J1I.6 J1J.6 J1K.6 J1L.6 R13.1 U3.1 U5.A95 | length 24523
  Top Layer (*.GTL) w5: v1(6746,9157) 6749,9154 U3.1@7204,9154
  Mid-Layer 1 (*.G1) w5: J1G.6@715.5,2466.14 766.22,2415.42 1470.34,2415.42 1477.91,2422.98 1570.82,2422.98 1603.15,2455.32 1701.82,2455.32 1729.72,2427.42 1999.07,2427.42 1999.35,2427.14 2076.5,2427.14 J1H.6@2115.5,2466.14 2158.66,2422.98 2361.7,2422.98 2408.8,2470.08 v1(2733,2470.08) 2819,2470.08 2855,2434.08 2981.91,2434.08 3003.15,2455.32 3101.82,2455.32 3130.49,2426.65 3476.01,2426.65 J1I.6@3515.5,2466.14 3567.22,2414.42 4269.34,2414.42 4277.91,2422.98 4370.82,2422.98 4403.15,2455.32 4739.05,2455.32 4777.95,2416.42 4865.78,2416.42 J1J.6@4915.5,2466.14 4967.22,2414.42 5669.34,2414.42 5677.91,2422.98 5770.82,2422.98 5803.15,2455.32 6139.05,2455.32 6179.95,2414.42 6251.05,2414.42 6252.05,2415.42 6264.78,2415.42 J1K.6@6315.5,2466.14 6366.22,2415.42 7070.34,2415.42 7077.91,2422.98 7170.82,2422.98 7203.15,2455.32 7539.05,2455.32 7578.95,2415.42 7664.78,2415.42 J1L.6@7715.5,2466.14 ; J1A.6@715.51,7717.32 766.24,7666.6 1470.36,7666.6 1477.92,7674.16 1570.83,7674.16 1603.17,7706.5 1701.83,7706.5 1729.74,7678.6 1999.08,7678.6 1999.36,7678.32 2076.51,7678.32 J1B.6@2115.51,7717.32 2167.24,7665.6 2869.36,7665.6 2877.92,7674.16 2970.83,7674.16 3003.17,7706.5 3101.83,7706.5 3130.5,7677.83 3476.02,7677.83 J1C.6@3515.51,7717.32 3567.24,7665.6 4269.36,7665.6 4277.92,7674.16 4370.83,7674.16 4403.17,7706.5 4739.06,7706.5 4777.96,7667.6 4865.79,7667.6 J1D.6@4915.51,7717.32 4958.67,7674.16 5770.83,7674.16 5803.17,7706.5 6139.06,7706.5 6179.96,7665.6 6251.06,7665.6 6252.06,7666.6 6264.79,7666.6 J1E.6@6315.51,7717.32 6358.67,7674.16 6561.71,7674.16 6589.55,7702 6939.95,7702 6967.79,7674.16 7170.83,7674.16 7203.17,7706.5 7539.06,7706.5 7578.96,7666.6 7664.79,7666.6 J1F.6@7715.51,7717.32 7758.27,7760.08 v1(8173,7760.08)
  Bottom Layer (*.GBL) w5: R13.1@2697,2604 2697,2506.08 v1(2733,2470.08) 2733,2477.08 2772,2516.08 2772,3514.6 D5.1@2890,3632.6 2890,3682.6 2935.79,3728.39 U5.A95@3059.12,3728.39 ; v1(6746,9157) 6796,9107 v1(6796,7702) ; J1L.6@7715.5,2466.14 7760.35,2466.14 7799.35,2505.14 7931.65,2505.14 7954.5,2482.3 7954.5,2469.57 7966.93,2457.14 8053.73,2457.14 8059,2462.41 8059,2528.35 8187,2656.35 8187,7537.81 8181.73,7543.08 8178,7543.08 8174.5,7546.58 v1@8174.5,7761.08
TCK: J2.8 U5.A55 | length 5909.5
  Top Layer (*.GTL) w5: J2.8@2195,9256.08 2220,9256.08 2264,9300.08 v1(2635,9300.08)
  Bottom Layer (*.GBL) w5: v1(2635,9300.08) 2635,9080.08 2778,8937.08 2778,6655.08 2864.68,6568.4 2864.68,5394.4 2784,5313.72 2784,4977.72 2702,4895.72 2702,4403.44 2759.79,4345.65 2985.29,4345.65 3012,4318.94 U5.A55@3059.12,4318.94
TDI: J2.12 U5.A49 | length 5726.7
  Top Layer (*.GTL) w5: J2.12@2195,9056.08 2241,9102.08 2701,9102.08 v1(2710,9111.08)
  Bottom Layer (*.GBL) w5: v1(2710,9111.08) v1(2710,9111.08) 2805,9016.15 2805,6666.26 2883.77,6587.49 2886.41,6584.85 2889.04,6582.22 2891.68,6579.58 2891.68,5383.22 2889.04,5380.58 2886.41,5377.94 2883.77,5375.31 2811,5302.53 2811,4966.53 2729,4884.53 2729,4414.62 2770.97,4372.65 3006.66,4372.65 3012,4377.99 U5.A49@3059.12,4377.99
TDO: J2.14 U5.A53 | length 5665.3
  Top Layer (*.GTL) w5: J2.14@2195,8956.08 2232,8956.08 2280,9004.08 v1(2748,9004.08)
  Bottom Layer (*.GBL) w5: v1@2747.18,9003.26 2787,8963.43 2787,6658.81 2871.04,6574.76 2873.68,6572.13 2873.68,5390.67 2871.04,5388.03 2793,5309.99 2793,4973.99 2711,4891.99 2711,4407.17 2763.52,4354.65 2995.97,4354.65 3012,4338.62 U5.A53@3059.12,4338.62
TEMP_INLET: C3.2 R9.1 TP4.1 U5.A37 | length 9996.9
  Top Layer (*.GTL) w5: v1(1334.03,8928.05) 1424.76,8928.05 1462.36,8890.44 2232.36,8890.44 2261.97,8920.05 3921.97,8920.05 v1(3923,8921.08) ; v1(1477.03,5139.11) 1481.06,5135.08 3288.27,5135.08 3305.27,5118.08 3312.73,5118.08 3315.36,5120.71 3319.93,5125.28 v1(3359.3,5125.28) ; v1(2980,4498.26) 2987.5,4490.76 3364,4490.76 3369.82,4496.58 3402.5,4496.58 v1(3402.97,4497.05)
  Bottom Layer (*.GBL) w5: v1(1334.03,8928.05) 1334,7095.35 1477.03,6952.32 v1(1477.03,5139.11) ; v1(2980,4498.26) 2987.5,4490.76 3053.78,4490.76 U5.A37@3059.12,4496.1 ; v1(3359.3,5125.28) 3356,5121.98 3356,4544.02 v1(3402.97,4497.05)
  Bottom Layer (*.GBL) w10: v1(3923,8921.08) 3923,9030.08 3988,9095.08 TP4.1@4025,9095.08 4135,9095.08 C3.2@4165,9125.08 R9.1@4250,9125.08
TEMP_OUTLET: C4.2 R11.1 TP5.1 U5.A39 | length 7849.9
  Top Layer (*.GTL) w5: v1(1353,9179) 1631,9179 v1(1659,9207) ; v1(1494,5156.08) 1506,5144.08 3292,5144.08 3309,5127.08 3327,5145.08 v1(3339.5,5145.08) ; v1(2980,4474.26) 2987.5,4481.76 3384.32,4481.76 v1(3386,4480.08)
  Bottom Layer (*.GBL) w5: v1(1353,9179) 1353,8913.08 1343,8903.08 1343,7099.08 1494,6948.08 v1(1494,5156.08) ; v1(1659,9207) 1610,9207 R11.1@1606,9211 C4.2@1606,9301 1606,9373 1704,9471 TP5.1@1748,9471 ; v1(2980,4474.26) 2987.5,4481.76 3013.66,4481.76 3019,4476.42 U5.A39@3059.12,4476.42 ; v1(3339.5,5145.08) 3342.8,5141.78 3342.8,4625.28 3347,4621.08 3347,4519.08 v1(3386,4480.08)
TMS: J2.6 U5.A51 | length 6020.7
  Top Layer (*.GTL) w5: J2.6@2195,9356.08 2226,9356.08 2280,9410.08 v1(2684,9410.08)
  Bottom Layer (*.GBL) w5: v1@2685,9410.08 2685,9100.79 2796,8989.79 2796,6662.53 2877.41,6581.13 2880.04,6578.49 2882.68,6575.85 2882.68,5386.94 2880.04,5384.31 2877.41,5381.67 2802,5306.26 2802,4970.26 2720,4888.26 2720,4410.89 2767.25,4363.65 3006.66,4363.65 3012,4358.31 U5.A51@3059.12,4358.31
TRST: J2.10 U5.A45 | length 5827.8
  Top Layer (*.GTL) w5: J2.10@2195,9156.08 2208,9156.08 2252,9200.08 v1(2761,9200.08)
  Bottom Layer (*.GBL) w5: v1@2760,9200.08 2760,9131.86 2823,9068.86 2823,6673.72 2896.5,6600.22 2899.14,6597.58 2901.77,6594.95 2904.41,6592.31 2907.04,6589.67 2909.68,6587.04 2909.68,5375.76 2907.04,5373.12 2904.41,5370.49 2901.77,5367.85 2899.14,5365.22 2896.5,5362.58 2829,5295.08 2829,4959.08 2747,4877.08 2747,4422.08 2778.43,4390.65 2985.29,4390.65 3012,4417.36 U5.A45@3059.12,4417.36
USB_D+: J4.3 U5.A35 | length 5314.5
  Bottom Layer (*.GBL) w5: U5.A35@3059.12,4515.79 3052.16,4515.79 3044.89,4508.51 3027.89,4508.51 3021.46,4502.08 2999.52,4502.08 2986.83,4514.76 2973.17,4514.76 2960.48,4502.08 2823.54,4502.08 2764.27,4561.35 2761.64,4563.99 2759,4566.62 2759,4808.53 2761.64,4811.17 2764.27,4813.81 2892.57,4942.11 2892.57,5207.15 2966,5280.58 2966,9026.53 3076.91,9137.44 3076.91,9280.39 3122.78,9326.26 J4.3@3122.78,9387.37
USB_D-: J4.2 U5.A33 | length 5163.5
  Bottom Layer (*.GBL) w5: 3024.08,4523.76 2969.44,4523.76 2956.76,4511.08 2827.27,4511.08 2770.64,4567.71 2768,4570.35 2768,4804.81 2770.64,4807.44 2901.57,4938.38 2901.57,5203.42 2975,5276.85 2975,9022.81 3122.78,9170.59 J4.2@3122.78,9261.39 ; 3024.08,4524.39 3027.89,4528.19 3051.84,4528.19 U5.A33@3059.12,4535.47
USB_VBUS: J4.1 U5.A31 | length 5190.3
  Bottom Layer (*.GBL) w5: U5.A31@3059.12,4555.16 3012,4555.16 2989.6,4532.76 2965.71,4532.76 2953.03,4520.08 2831,4520.08 2777,4574.08 2777,4801.08 2910.57,4934.65 2910.57,5199.69 2984,5273.12 2984,9019.08 2991,9026.08 3131.78,9166.86 3131.78,9171.96 J4.1@3221.2,9261.39
VA25: L1.10 L1.15 U5.A66 | length 8119.8
  Top Layer (*.GTL) w5: v1(3366,4027.98) 3381,4012.98 4238.56,4012.98 4255.37,4029.78 4278.7,4029.78 v1(4282,4033.08) ; v1(4098,8914.08) 4145,8914.08 4160.94,8930.02 5436.91,8930.02 5481,8974.11 5481,8977.84 5490,8986.84 5490,8990.56 5499,8999.56 5499,9003.29 5508,9012.29 5508,9016.02 5517,9025.02 v1(5517,9395.08)
  Bottom Layer (*.GBL) w5: U5.A66@3302.43,4023.66 3361.69,4023.66 v1(3366,4027.98) ; v1(4098,8914.08) 4063,8879.08 4063,6637.26 4316,6384.26 4316,4156.08 4241,4081.08 4241,4074.08 v1(4282,4033.08) ; v1(5516,9143.08) 5518,9145.08 L1.10@5632,9145.08 ; v1(5517,9395.08) L1.15@5632,9395.08
~CARD_PRESENT1: J1A.10 RN1.7 | length 6849.8
  Mid-Layer 1 (*.G1) w5: v1(1134,5194.08) 1148.91,5179.17 2523.76,5179.17 2535.17,5190.58 2548.83,5190.58 2557.33,5182.08 2771.91,5182.08 2785.94,5168.05 2789.46,5164.53 2876.91,5077.08 3127.46,5077.08 3137.85,5066.69 v1(3554.61,5066.69)
  Bottom Layer (*.GBL) w5: J1A.10@715.51,7817.32 715.51,7876.08 696.51,7895.08 575.03,7895.08 538,7858.05 538,6779.11 606.03,6711.08 1115,6711.08 1139,6687.08 1139,5197.08 1136,5194.08 v1(1134,5194.08) ; v1(3554.61,5066.69) 3554.61,5013.65 3687,4881.26 3689.64,4878.63 3692.27,4875.99 3694.91,4873.35 3694.91,4613.99 3692.27,4611.35 3689.64,4608.72 3687,4606.08 3560,4479.08 3560,4338.09 3576,4322.09 RN1.7@3603.94,4322.09
~CARD_PRESENT2: J1B.10 RN1.5 | length 5047.3
  Mid-Layer 1 (*.G1) w5: v1@2543,5173.08 2763.94,5173.08 2780.97,5156.05 2868.94,5068.08 3123.73,5068.08 3142.09,5049.72 v1(3537.64,5049.72)
  Bottom Layer (*.GBL) w5: J1B.10@2115.51,7817.32 2115.51,7873.08 2137.51,7895.08 2324,7895.08 2395,7824.08 2395,6707.87 2544,6558.87 2544,5175.08 2543,5174.08 v1(2542,5174.08) ; v1(3537.64,5049.72) 3537.64,5017.9 3680.64,4874.9 3683.27,4872.26 3685.91,4869.63 3685.91,4617.72 3683.27,4615.08 3680.64,4612.44 3551,4482.81 3551,4315.59 3576,4290.59 RN1.5@3603.94,4290.59
~CARD_PRESENT3: J1C.10 RN1.3 | length 4759.2
  Mid-Layer 1 (*.G1) w5: v1(3520.67,5032.75) 3680.67,5032.75 3721,5073.08 v1(3934,5073.08)
  Bottom Layer (*.GBL) w5: J1C.10@3515.51,7817.32 3473.27,7775.08 3396,7775.08 3360,7739.08 3360,7708.08 3356.5,7704.58 3356.5,6847.58 3455,6749.08 3911.14,6749.08 3971.5,6688.72 3971.5,5571.44 3934,5533.94 v1(3934,5073.08) ; v1(3520.67,5032.75) 3520.67,5022.14 3674.27,4868.53 3676.91,4865.9 3676.91,4621.44 3674.27,4618.81 3542,4486.53 3542,4293.09 3576,4259.09 RN1.3@3603.94,4259.09
~CARD_PRESENT4: J1D.10 RN1.1 | length 6287.9
  Top Layer (*.GTL) w5: v1(3503.7,5015.78) 3568.7,5015.78 3712,5159.08 5308.39,5159.08 5337.39,5188.08 v1@5349,5188.08
  Bottom Layer (*.GBL) w5: v1(3503.7,5015.78) 3514.3,5015.78 3667.91,4862.17 3667.91,4625.17 3533,4490.26 3533,4270.6 3576,4227.6 RN1.1@3603.94,4227.6 ; J1D.10@4915.51,7817.32 4915.51,7879.08 4881.51,7913.08 4739.3,7913.08 4719,7892.78 4719,7827.08 4725,7821.08 4725,7786.94 4751,7760.94 4751,6997.94 4831.86,6917.08 5108,6917.08 5349,6676.08 v1(5349,5189.08)
~CARD_PRESENT5: J1E.10 RN2.7 | length 7882.4
  Top Layer (*.GTL) w5: v1(3486.73,4998.81) 3571.73,4998.81 3723,5150.08 6668,5150.08 v1(6688,5170.08)
  Bottom Layer (*.GBL) w5: v1(3486.73,4998.81) 3518.55,4998.81 3658.91,4858.44 3658.91,4628.9 3513,4482.99 3513,4040.09 3576,3977.09 RN2.7@3633.94,3977.09 ; J1E.10@6315.51,7817.32 6315.51,7876.08 6276.51,7915.08 6167.03,7915.08 6119,7867.05 6119,7040.11 6199.03,6960.08 6421,6960.08 6688,6693.08 v1(6688,5170.08)
~CARD_PRESENT6: J1F.10 RN2.5 | length 9159.5
  Top Layer (*.GTL) w5: v1(3469.76,4981.83) 3578.76,4981.83 3738,5141.08 5315.85,5141.08 5326.85,5130.08 6696.94,5130.08 6700.44,5133.58 6721.56,5133.58 6725.06,5130.08 7983,5130.08 v1(8005,5152.08)
  Bottom Layer (*.GBL) w5: v1(3469.76,4981.83) 3522.79,4981.83 3649.91,4854.72 3649.91,4632.63 3504,4486.72 3504,4036.36 3507,4033.36 3507,4014.59 3576,3945.59 RN2.5@3633.94,3945.59 ; J1F.10@7715.51,7817.32 7666.76,7866.08 7601,7866.08 7541,7806.08 7541,7026.08 7645,6922.08 7945.27,6922.08 8017,6850.35 8017,5164.08 v1(8005,5152.08)
~CARD_PRESENT7: J1G.10 RN2.3 | length 7261.1
  Mid-Layer 1 (*.G1) w5: v1(548,1405.08) 2249,1405.08 2437.5,1593.58 2573.83,1593.58 2575.33,1595.08 2735.73,1595.08 2861.73,1721.08 3656,1721.08 v1(3761,1616.08)
  Bottom Layer (*.GBL) w5: v1(548,1405.08) 548.5,1405.58 548.5,2569.58 595,2616.08 665.56,2616.08 J1G.10@715.5,2566.14 ; RN2.3@3633.94,3914.09 3595,3914.09 3509,3828.09 3509,3563.26 3780,3292.26 3780,1844.08 3780,1619.08 3777,1616.08 v1(3761,1616.08)
~CARD_PRESENT8: J1H.10 RN2.1 | length 5893.3
  Mid-Layer 1 (*.G1) w5: v1(1947,1375.08) 2272.44,1375.08 2481.94,1584.58 2693.5,1584.58 2695,1586.08 2739.46,1586.08 2865.46,1712.08 3641,1712.08 v1(3761,1592.08)
  Bottom Layer (*.GBL) w5: v1(1947,1375.08) 1947.5,1375.58 1947.5,2568.58 1996,2617.08 2064.56,2617.08 J1H.10@2115.5,2566.14 ; RN2.1@3633.94,3882.6 3595,3882.6 3521,3808.6 3521,3576.71 3791,3306.71 3791,1844.08 3791,1617.35 3765.73,1592.08 v1(3761,1592.08)
~CARD_PRESENT9: J1I.10 RN3.7 | length 1504.4
  Top Layer (*.GTL) w5: v1(3462,3792.08) 3590,3792.08 v1(3594,3796.08)
  Bottom Layer (*.GBL) w5: v1(3462,3792.08) 3462,3443.08 3361,3342.08 3361,2720.64 J1I.10@3515.5,2566.14 ; v1@3595,3797.09 RN3.7@3633.94,3797.09
~CARD_PRESENT10: J1J.10 RN3.5 | length 5177.4
  Top Layer (*.GTL) w5: v1(3868,1492.08) 3868,1516.08 3906.5,1554.58 3968.83,1554.58 3976.33,1562.08 4288.73,1562.08 4332.73,1606.08 4802.22,1606.08 4851.78,1655.64 4905.22,1655.64 4943.05,1617.81 v1@5201,1617.81
  Bottom Layer (*.GBL) w5: RN3.5@3633.94,3765.59 3595,3765.59 3545,3715.59 3545,3578.17 3802,3321.17 3802,1558.08 v1(3868,1492.08) ; J1J.10@4915.5,2566.14 4963.44,2614.08 5164,2614.08 5201,2577.08 5201,1622.08 v1(5198,1619.08)
~CARD_PRESENT11: J1K.10 RN3.3 | length 6622.9
  Top Layer (*.GTL) w5: v1(3892,1492.08) 3892,1516.08 3921.5,1545.58 3972.56,1545.58 3974.06,1547.08 4286.46,1547.08 4336.46,1597.08 4805.95,1597.08 4855.51,1646.64 4901.49,1646.64 4955.32,1592.81 5320.4,1592.81 5772.13,1141.08 v1@6149,1141.08
  Bottom Layer (*.GBL) w5: RN3.3@3633.94,3734.09 3595,3734.09 3557,3696.09 3557,3591.62 3813,3335.62 3813,1571.08 v1(3892,1492.08) ; v1(6149,1140.08) 6155,1146.08 6155,2588.08 6182.56,2615.64 6266,2615.64 J1K.10@6315.5,2566.14
~CARD_PRESENT12: J1L.10 RN3.1 | length 7989.6
  Top Layer (*.GTL) w5: v1(3916,1492.08) 3916,1516.08 3923,1523.08 4285,1523.08 4350,1588.08 4803.07,1588.08 4855.51,1535.64 4901.49,1535.64 4933.65,1567.81 5310.05,1567.81 5771.78,1106.08 v1@7545,1106.08
  Bottom Layer (*.GBL) w5: RN3.1@3633.94,3702.6 3595,3702.6 3569,3676.6 3569,3605.08 3824,3350.08 3824,1584.08 v1(3916,1492.08) ; v1(7545,1107.08) 7553,1115.08 7553,2578.08 7595,2620.08 7661.56,2620.08 J1L.10@7715.5,2566.14
~CS_BACKPLANE: Q3.1 U5.A97 | length 10118.1
  Top Layer (*.GTL) w5: v1(2998,3709) 4556,3709 v1(4557,3710) ; v1(4559,5246) v1(7122,5246) ; v1(6980,8852) v1(7398,8852) ; v1(7373,9123) 7373,9155 Q3.1@7374,9156
  Bottom Layer (*.GBL) w5: v1(2998,3709) 2998.3,3708.7 U5.A97@3059.12,3708.7 ; v1(4557,3710) 4557,5244 v1(4559,5246) ; v1(6980,8852) 6980,7216 7122,7074 v1(7122,5246) ; v1(7373,9123) 7398,9098 v1(7398,8852)
~CS_SLOT1: D2.1 J1A.4 J1A.9 U5.A71 | length 6963.8
  Top Layer (*.GTL) w5: J1A.9@615.51,7817.32 662.83,7770 838,7770 866,7742 866,7667 915.51,7617.49 J1A.4@915.51,7617.32
  Mid-Layer 1 (*.G1) w5: v1(1151,5010.08) 1153,5012.08 2558.12,5012.08 2573.12,4997.08 2580.67,4997.08 2581.67,4998.08 2612.33,4998.08 2613.33,4997.08 v1(2742,4997.08)
  Bottom Layer (*.GBL) w5: J1A.9@615.51,7817.32 615.51,7876.08 608.51,7883.08 580,7883.08 550,7853.08 550,6784.08 611,6723.08 1119.97,6723.08 1147.49,6695.56 1151,6692.05 v1(1151,5010.08) ; v1(2742,4997.08) 2689,4944.08 2689,4034.6 2716,4007.6 D2.1@2820,4007.6 2850,4037.6 2915,4037.6 2987.99,3964.61 U5.A71@3059.12,3964.61
~CS_SLOT2: D2.3 J1B.4 J1B.9 U5.A73 | length 5418.5
  Top Layer (*.GTL) w5: J1B.9@2015.51,7817.16 2062.83,7769.83 2238,7769.83 2266,7741.83 2266,7666.83 J1B.4@2315.51,7617.32
  Mid-Layer 1 (*.G1) w5: v1(2558,5033.08) 2559,5032.08 2572.06,5032.08 2590.09,5014.05 v1(2725.03,5014.05)
  Bottom Layer (*.GBL) w5: J1B.9@2015.51,7817.32 2015.51,7873.08 2052.51,7910.08 2330.21,7910.08 2410,7830.29 2410,6714.08 2559,6565.08 2559,5034.08 v1(2558,5033.08) ; v1(2725.03,5014.05) 2677,4966.02 2677,4013.1 2716,3974.1 2844.64,3974.1 2878.14,4007.6 D2.3@2879.06,4007.6 2920,4007.6 2982.68,3944.92 U5.A73@3059.12,3944.92
~CS_SLOT3: D2.5 J1C.4 J1C.9 U5.A75 | length 6838.4
  Top Layer (*.GTL) w5: J1C.9@3415.51,7817.16 3462.83,7769.83 3638,7769.83 3666,7741.83 3666,7666.83 J1C.4@3715.51,7617.32
  Mid-Layer 1 (*.G1) w5: v1(2731.88,5203.14) 2732.69,5203.95 2768.13,5203.95 2886,5086.08 3594.07,5086.08 3597.57,5082.58 3897.5,5082.58 v1(3910,5095.08)
  Bottom Layer (*.GBL) w5: v1(2731.88,5203.14) 2708.06,5203.14 2708.06,5031.02 2665,4987.96 2665,3987.73 2716,3936.73 D2.5@2820,3936.73 2855.87,3972.6 2930,3972.6 2977.36,3925.24 U5.A75@3059.12,3925.24 ; 3342,7702.08 3342,7708.08 ; J1C.9@3415.51,7817.32 3415.51,7879.57 3406,7889.08 3367,7889.08 3342,7864.08 3342,7708.08 ; v1(3910,5095.08) 3912,5097.08 3912,5263.08 3924,5275.08 3924,5538.08 3962.5,5576.58 3962.5,6683.58 3907,6739.08 3450.86,6739.08 3346.5,6843.44 3346.5,7703.58 3342,7708.08